# EAGLE board stepper-shield (EAGLE 4.13)
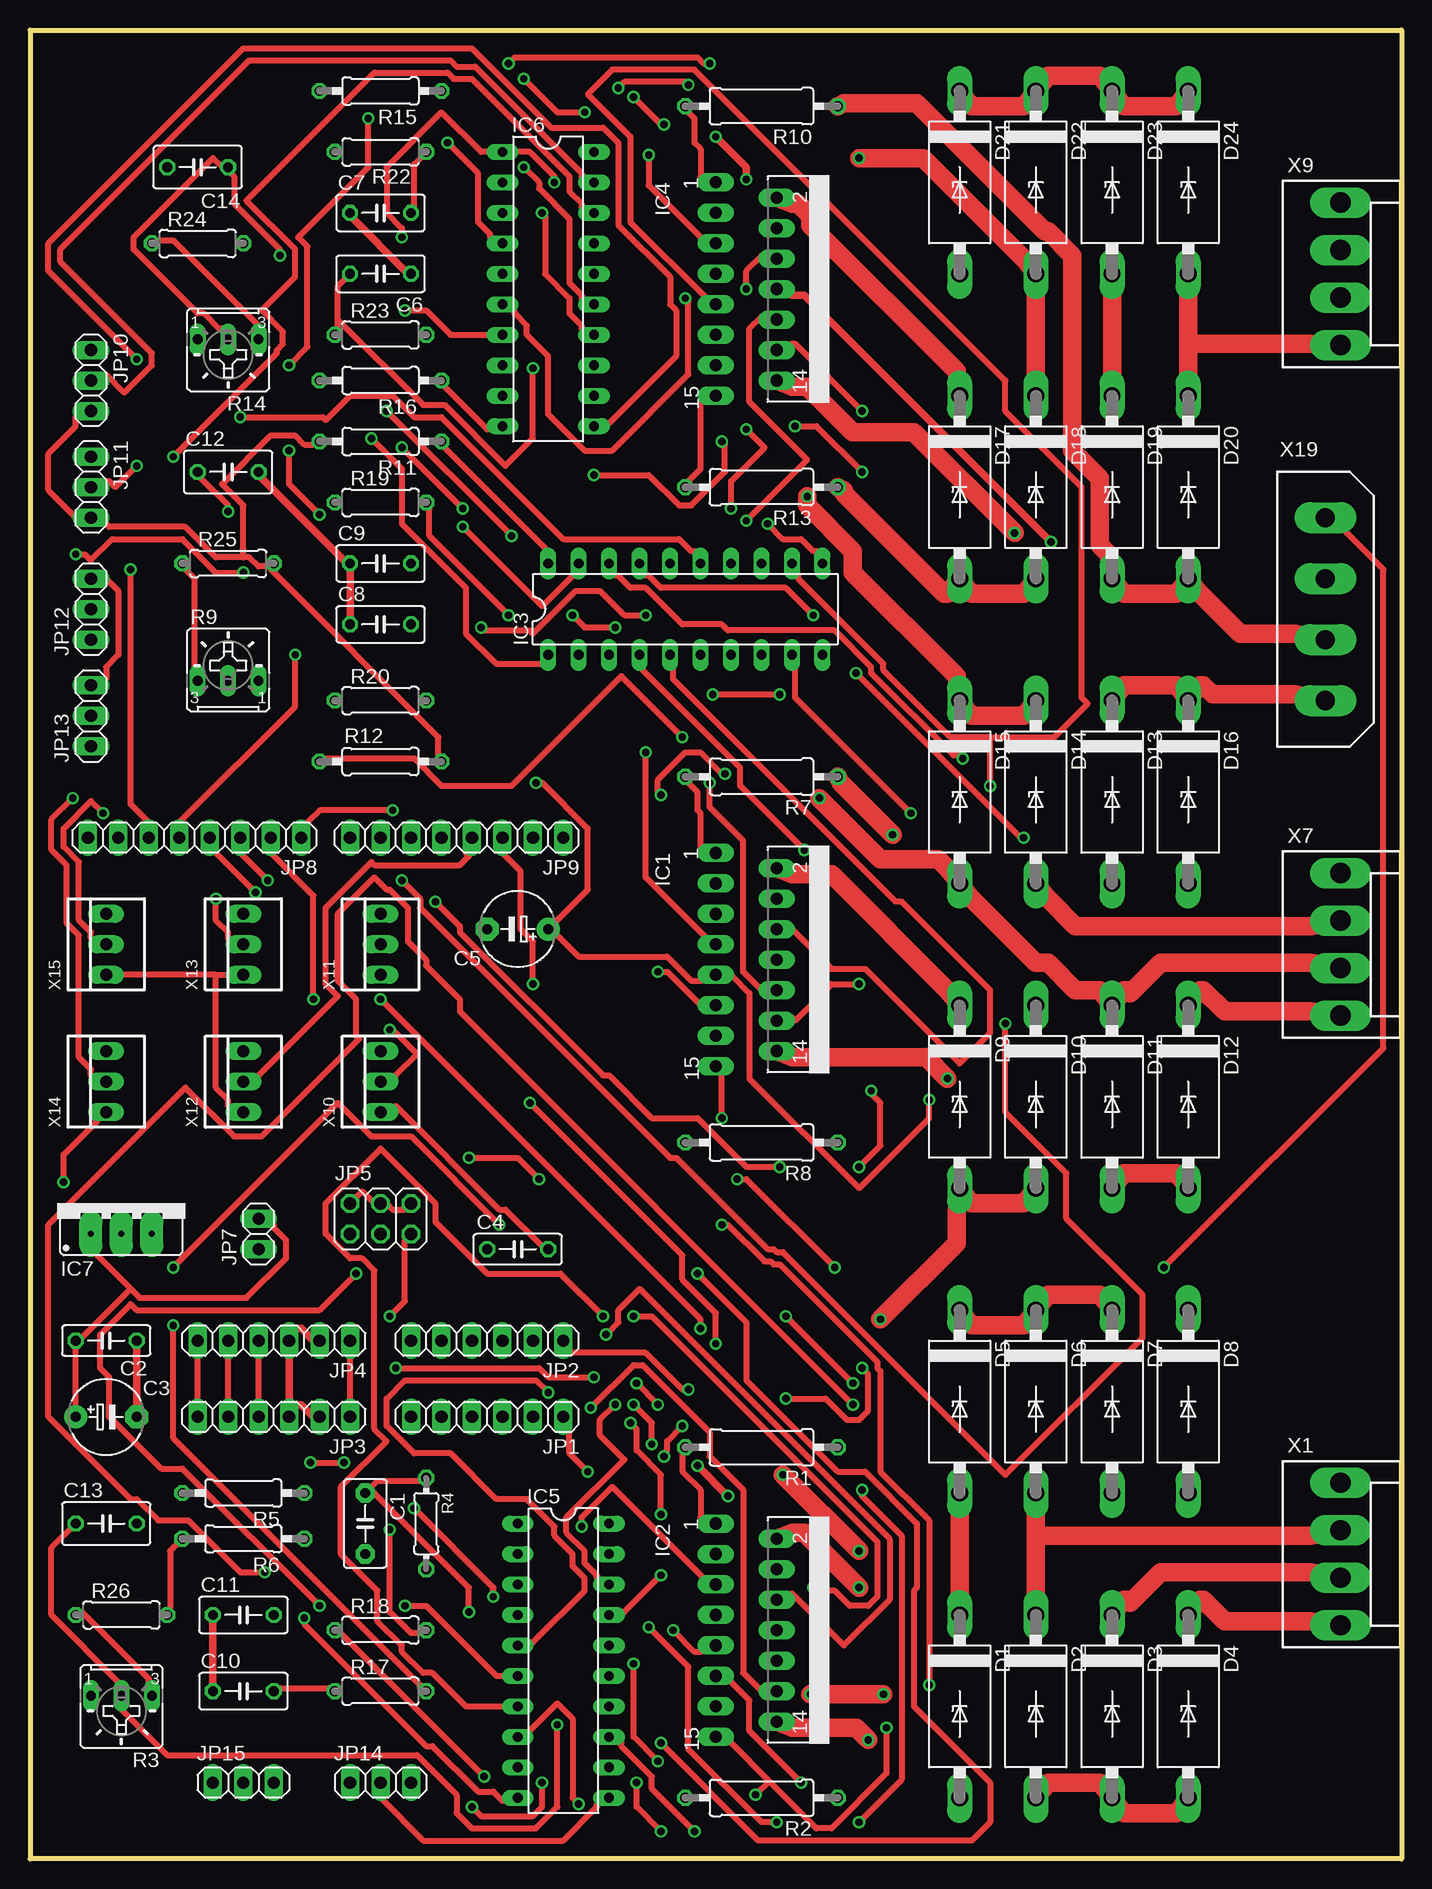
[diagram p0: board, top side]
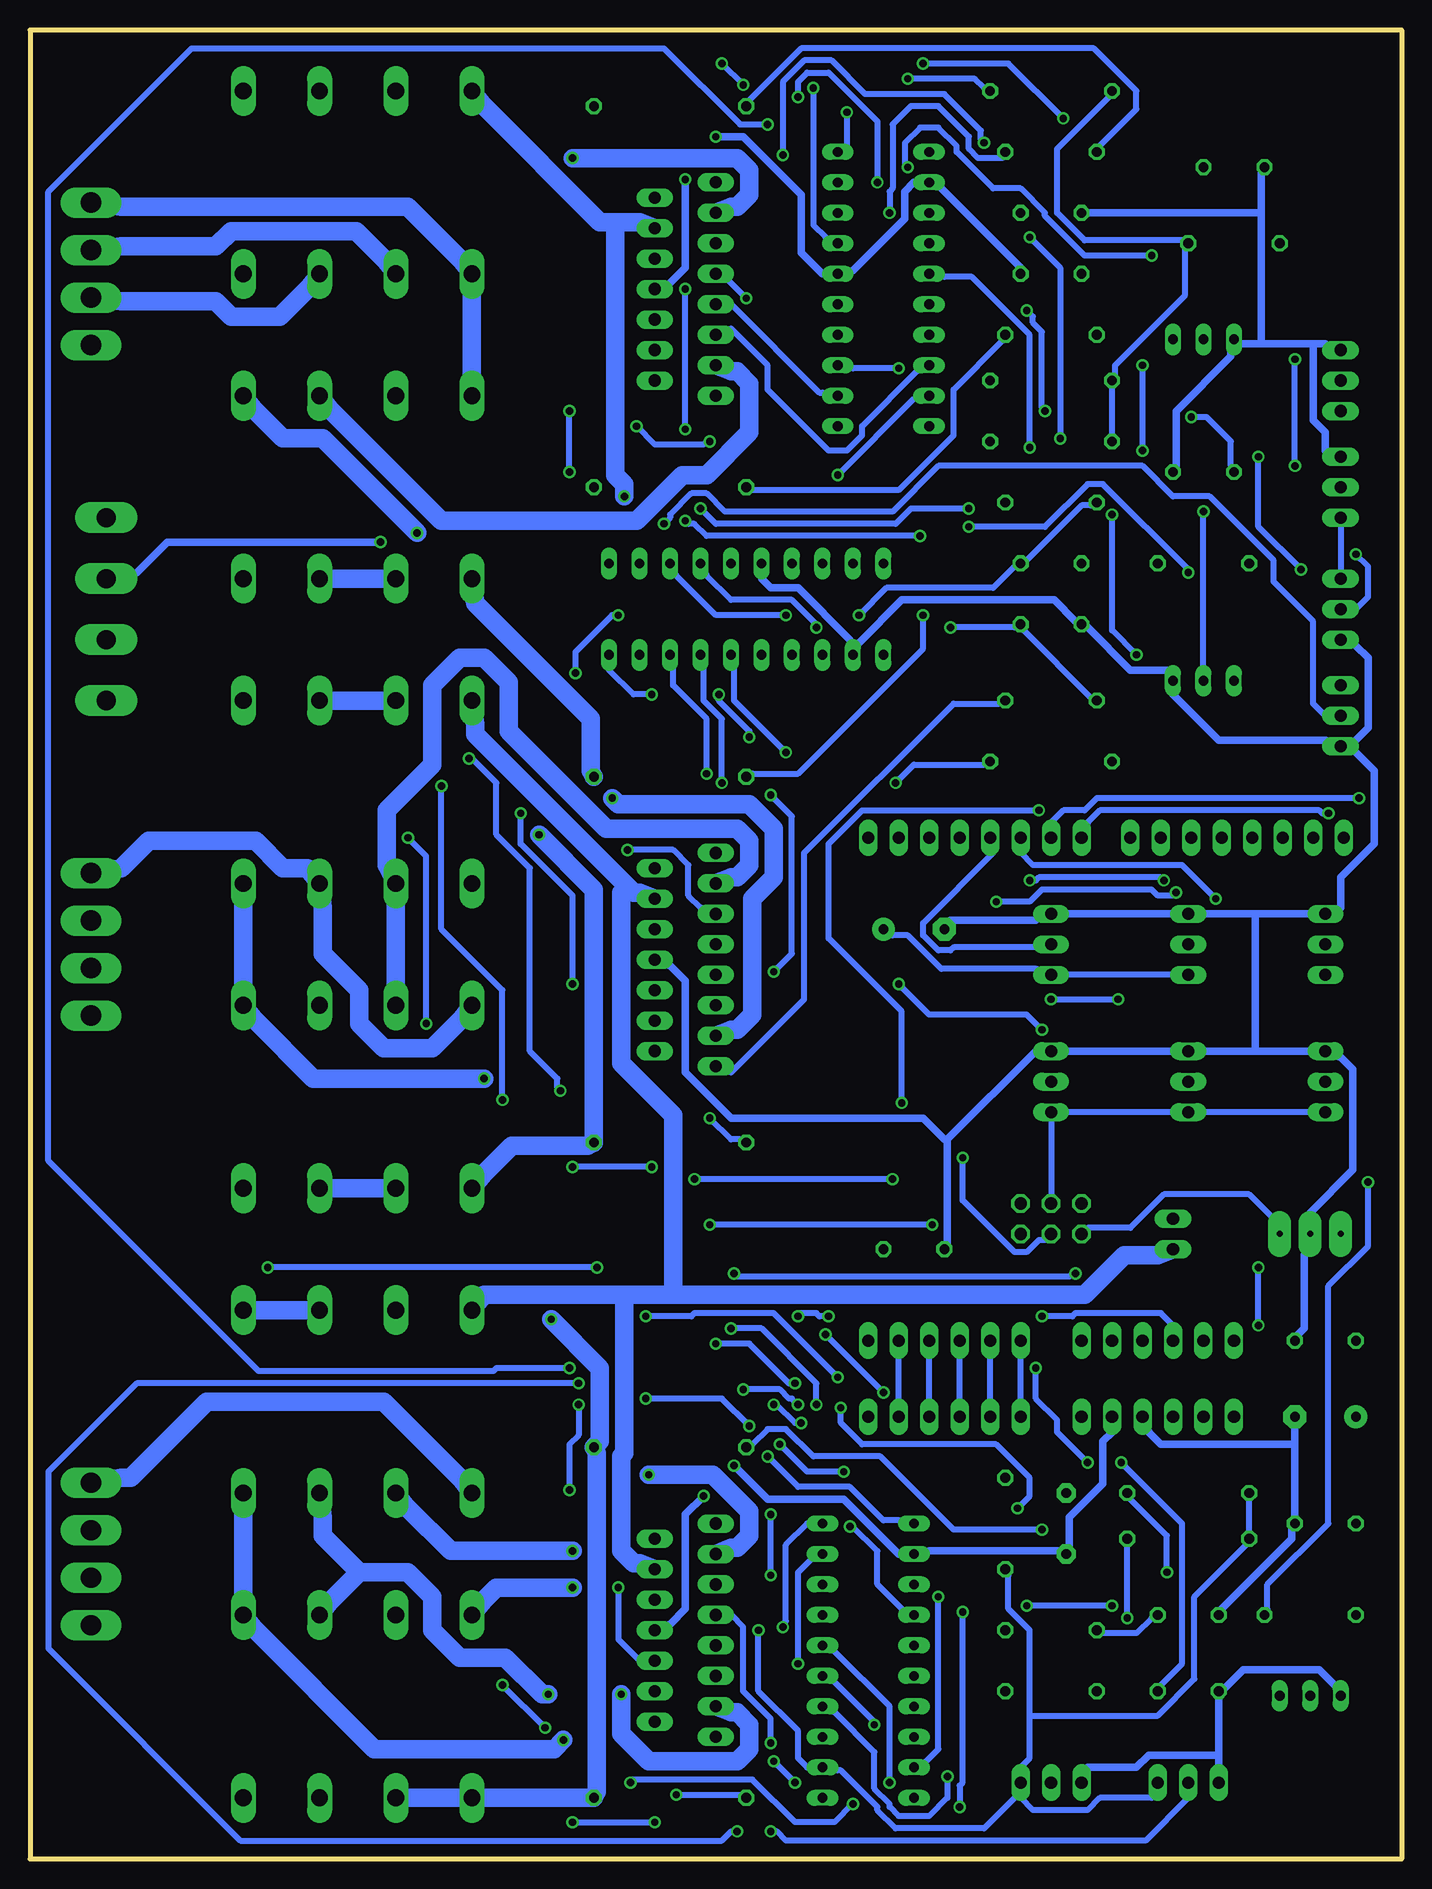
[diagram p1: board, bottom side, seen from below]

Size 114.3 x 152.4 mm. Coordinates in mm from the lower left corner, seen from the top.
Outline: 114.3,152.4 114.3,0 0,0 0,152.4 114.3,152.4
Copper layers (1*16): Top 0.035mm / dielectric 1.5mm / Bottom 0.035mm
Design rules "default": minimum track width 10mil, minimum drill 24mil, track to track 8mil, track to pad 8mil, pad to pad 8mil, via to via 8mil, smd to smd 8mil, copper to edge 40mil, drill to drill 8mil, minimum pad ring 10mil, minimum via ring 8mil, stop-mask expansion 4mil, vias tented up to drill 0mil, thermal gap 10mil
Net classes: 0 default: width 0.508 mm, drill 0.381 mm; 1 Power: width 1.524 mm, drill 0.508 mm; 2 Signal: width 0.635 mm, drill 0.381 mm; 3 Ground: width 0.635 mm, drill 0.381 mm

## Footprints (pad centres in the part's own frame; a part is rotated, then mirrored left to right if it is on the bottom)
C5B3.5 = drill 0.813 pad 1.6 octagon: 1 -2.54,0; 2 2.54,0
C050-025X075 = drill 0.813 octagon: 1 -2.54,0; 2 2.54,0
E5-6 = drill 0.813 pad 1.905 round: + -2.54,0 | drill 0.813 pad 1.905 octagon: - 2.54,0
C050-030X075 = drill 0.813 octagon: 1 -2.54,0; 2 2.54,0
C050-035X075 = drill 0.813 octagon: 1 -2.54,0; 2 2.54,0
CB429-15 = drill 1.397 long: A 7.62,0; C -7.62,0
MULTIWATT-15 = drill 1.016 long: 1 -8.89,-7.62; 2 -7.62,-2.54; 3 -6.35,-7.62; 4 -5.08,-2.54; 5 -3.81,-7.62; 6 -2.54,-2.54; 7 -1.27,-7.62; 8 0,-2.54; 9 1.27,-7.62; 10 2.54,-2.54; 11 3.81,-7.62; 12 5.08,-2.54; 13 6.35,-7.62; 14 7.62,-2.54; 15 8.89,-7.62
DIL20 = drill 0.813 long: 1 -11.43,-3.81; 2 -8.89,-3.81; 3 -6.35,-3.81; 4 -3.81,-3.81; 5 -1.27,-3.81; 6 1.27,-3.81; 7 3.81,-3.81; 8 6.35,-3.81; 9 8.89,-3.81; 10 11.43,-3.81; 11 11.43,3.81; 12 8.89,3.81; 13 6.35,3.81; 14 3.81,3.81; 15 1.27,3.81; 16 -1.27,3.81; 17 -3.81,3.81; 18 -6.35,3.81; 19 -8.89,3.81; 20 -11.43,3.81
78XXS = drill 0.5 pad 1.93 long: GND 0,-2.54; IN -2.54,-2.54; OUT 2.54,-2.54
1X06 = drill 1.016 long: 1 -6.35,0; 2 -3.81,0; 3 -1.27,0; 4 1.27,0; 5 3.81,0; 6 6.35,0
2X03 = drill 1.016 octagon: 1 -2.54,-1.27; 2 -2.54,1.27; 3 0,-1.27; 4 0,1.27; 5 2.54,-1.27; 6 2.54,1.27
1X02 = drill 1.016 long: 1 -1.27,0; 2 1.27,0
1X08 = drill 1.016 long: 1 -8.89,0; 2 -6.35,0; 3 -3.81,0; 4 -1.27,0; 5 1.27,0; 6 3.81,0; 7 6.35,0; 8 8.89,0
1X03 = drill 1.016 long: 1 -2.54,0; 2 0,0; 3 2.54,0
0309/12 = drill 0.813 octagon: 1 -6.35,0; 2 6.35,0
B25U = drill 0.813 long: A 2.54,-0.889; E -2.54,-0.889; S 0,-0.889
0204/7 = drill 0.813 octagon: 1 -3.81,0; 2 3.81,0
0207/10 = drill 0.813 octagon: 1 -5.08,0; 2 5.08,0
0207/7 = drill 0.813 octagon: 1 -3.81,0; 2 3.81,0
KK-156-4 = drill 1.7 pad 2.184 long: 1 -5.94,0; 2 -1.98,0; 3 1.98,0; 4 5.94,0
22-23-2031 = drill 1 long: 1 -2.54,0; 2 0,0; 3 2.54,0
9090-4V = drill 1.6 pad 2.6 long: 1 -7.62,0; 2 -2.54,0; 3 2.54,0; 4 7.62,0

## Placement (x,y rotation side)
C1  3.3 nF  [C5B3.5]  27.94,27.94 270 top
C2  100nf  [C050-025X075]  6.35,43.18 180 top
C3  100uF  [E5-6]  6.35,36.83 0 top
C4  100nf  [C050-025X075]  40.64,50.8 0 top
C5  100uF  [E5-6]  40.64,77.47 180 top
C6  1n  [C050-030X075]  29.21,132.08 180 top
C7  1n  [C050-030X075]  29.21,137.16 0 top
C8  1n  [C050-030X075]  29.21,102.87 0 top
C9  1n  [C050-030X075]  29.21,107.95 0 top
C10  1n  [C050-030X075]  17.78,13.97 0 top
C11  1n  [C050-030X075]  17.78,20.32 0 top
C12  100nf  [C050-035X075]  16.51,115.57 0 top
C13  100nf  [C050-035X075]  6.35,27.94 0 top
C14  100nf  [C050-035X075]  13.97,140.97 180 top
D1  UF5404  [CB429-15]  77.47,12.7 270 top
D2  UF5404  [CB429-15]  83.82,12.7 270 top
D3  UF5404  [CB429-15]  90.17,12.7 270 top
D4  UF5404  [CB429-15]  96.52,12.7 270 top
D5  UF5404  [CB429-15]  77.47,38.1 270 top
D6  UF5404  [CB429-15]  83.82,38.1 270 top
D7  UF5404  [CB429-15]  90.17,38.1 270 top
D8  UF5404  [CB429-15]  96.52,38.1 270 top
D9  UF5404  [CB429-15]  77.47,63.5 270 top
D10  UF5404  [CB429-15]  83.82,63.5 270 top
D11  UF5404  [CB429-15]  90.17,63.5 270 top
D12  UF5404  [CB429-15]  96.52,63.5 270 top
D13  UF5404  [CB429-15]  90.17,88.9 270 top
D14  UF5404  [CB429-15]  83.82,88.9 270 top
D15  UF5404  [CB429-15]  77.47,88.9 270 top
D16  UF5404  [CB429-15]  96.52,88.9 270 top
D17  UF5404  [CB429-15]  77.47,114.3 270 top
D18  UF5404  [CB429-15]  83.82,114.3 270 top
D19  UF5404  [CB429-15]  90.17,114.3 270 top
D20  UF5404  [CB429-15]  96.52,114.3 270 top
D21  UF5404  [CB429-15]  77.47,139.7 270 top
D22  UF5404  [CB429-15]  83.82,139.7 270 top
D23  UF5404  [CB429-15]  90.17,139.7 270 top
D24  UF5404  [CB429-15]  96.52,139.7 270 top
IC1  L298  [MULTIWATT-15]  64.77,74.93 270 top
IC2  L298  [MULTIWATT-15]  64.77,19.05 270 top
IC3  L297  [DIL20]  54.61,104.14 0 top
IC4  L298  [MULTIWATT-15]  64.77,130.81 270 top
IC5  L297  [DIL20]  44.45,16.51 270 top
IC6  L297  [DIL20]  43.18,130.81 270 top
IC7  7805  [78XXS]  7.62,54.61 0 top
JP1  Arduino Analog  [1X06]  38.1,36.83 180 top
JP2  Stepper Analog  [1X06]  38.1,43.18 180 top
JP3  Arduino Power  [1X06]  20.32,36.83 180 top
JP4  Stepper Power  [1X06]  20.32,43.18 180 top
JP5  Vcc Select  [2X03]  29.21,53.34 0 top
JP7  12v Enable  [1X02]  19.05,52.07 90 top
JP8  Arduino 8-13  [1X08]  13.72,85.09 180 top
JP9  Arduino 0-7  [1X08]  35.56,85.09 180 top
JP10  Z Half / Full  [1X03]  5.08,123.19 270 top
JP11  Z Control  [1X03]  5.08,114.3 270 top
JP12  Y Half/Full  [1X03]  5.08,104.14 90 top
JP13  Y Control  [1X03]  5.08,95.25 90 top
JP14  X Control  [1X03]  29.21,6.35 0 top
JP15  X Half/Full  [1X03]  17.78,6.35 0 top
R1  0.5  [0309/12]  60.96,34.29 180 top
R2  0.5  [0309/12]  60.96,5.08 180 top
R3  2K  [B25U]  7.62,12.7 180 top
R4  22K  [0204/7]  33.02,27.94 270 top
R5  10K  [0207/10]  17.78,30.48 180 top
R6  10K  [0207/10]  17.78,26.67 180 top
R7  0.5  [0309/12]  60.96,90.17 180 top
R8  0.5  [0309/12]  60.96,59.69 180 top
R9  2K  [B25U]  16.51,99.06 0 top
R10  0.5  [0309/12]  60.96,146.05 180 top
R11  10K  [0207/10]  29.21,118.11 180 top
R12  10K  [0207/10]  29.21,91.44 0 top
R13  0.5  [0309/12]  60.96,114.3 180 top
R14  2K  [B25U]  16.51,125.73 180 top
R15  10K  [0207/10]  29.21,147.32 180 top
R16  10K  [0207/10]  29.21,123.19 180 top
R17  4K7  [0207/7]  29.21,13.97 0 top
R18  4K7  [0207/7]  29.21,19.05 0 top
R19  4K7  [0207/7]  29.21,113.03 0 top
R20  4K7  [0207/7]  29.21,96.52 0 top
R22  4K7  [0207/7]  29.21,142.24 180 top
R23  4K7  [0207/7]  29.21,127 0 top
R24  2K7  [0207/7]  13.97,134.62 0 top
R25  2K7  [0207/7]  16.51,107.95 0 top
R26  2K7  [0207/7]  7.62,20.32 0 top
X1  [KK-156-4]  109.22,25.4 270 top
X7  [KK-156-4]  109.22,76.2 270 top
X9  [KK-156-4]  109.22,132.08 270 top
X10  X Min  [22-23-2031]  29.21,64.77 90 top
X11  X Max  [22-23-2031]  29.21,76.2 90 top
X12  Y Min  [22-23-2031]  17.78,64.77 90 top
X13  Y Max  [22-23-2031]  17.78,76.2 90 top
X14  Z Min  [22-23-2031]  6.35,64.77 90 top
X15  Z Max  [22-23-2031]  6.35,76.2 90 top
X19  9090-4V  [9090-4V]  107.95,104.14 270 top

## Library data of the parts
C1 = capacitor-wima
C2-C14 R1 R2 R4-R8 R10-R13 R15-R20 R22-R26 = rcl
D1-D24 = diode
IC1-IC6 = st-microelectronics
IC7 = cls
JP1-JP5 JP7-JP15 = pinhead
R3 R9 R14 = pot
X1 X7 X9-X15 = con-molex
X19 = con-thomas-betts

## Nets
GND [Ground]: C1.2 C2.1 C3.- C4.1 C5.- C6.1 C7.1 C8.1 C9.1 C10.1 C11.1 C12.2 C13.2 C14.2 IC1.8 IC2.8 IC3.2 IC3.16 IC4.8 IC5.2 IC6.2 IC6.16 IC7.GND JP3.2 JP3.3 JP4.2 JP4.3 JP10.1 JP11.1 JP12.1 JP13.1 JP14.1 JP15.1 R3.A R9.A R14.A X10.3 X11.3 X12.3 X13.3 X14.3 X15.3 X19.2
GND1 [Power]: D1.A D2.A D3.A D4.A D9.A D10.A D11.A D12.A D17.A D18.A D19.A D20.A R1.1 R2.1 R7.1 R8.1 R10.1 R13.1 X19.3
N$1: IC2.11 IC5.8
N$2: IC2.6 IC5.5
N$3: IC2.12 IC5.9
N$4: IC2.10 IC5.7
N$5: IC2.7 IC5.6
N$6: IC2.5 IC5.4
N$7: C1.1 IC5.16 R4.1
N$8: C11.2 IC5.14 R18.1
N$9: IC2.15 R2.2 R17.2
N$10: IC5.17 JP8.1
N$11: IC5.18 JP8.2
N$12: IC2.1 R1.2 R18.2
N$13 [Power]: D4.C D8.A IC2.14 X1.4
N$14: IC5.10 R6.1
N$15: IC5.20 R5.1
N$16: IC1.11 IC3.8
N$17: IC1.6 IC3.5
N$18: IC5.19 JP15.2
N$19: IC1.12 IC3.9
N$20 [Power]: D3.C D7.A IC2.13 X1.3
N$21: R3.E R26.1
N$22 [Power]: D2.C D6.A IC2.3 X1.2
N$23: IC1.10 IC3.7
N$24: IC1.7 IC3.6
N$25: IC1.5 IC3.4
N$26: C9.2 IC3.14 R19.1
N$27: C8.2 IC3.13 R20.1
N$28: IC3.19 JP12.2
N$29: C12.1 IC3.15 R9.S
N$30: IC3.17 JP8.3
N$31: IC3.18 JP8.4
N$32: IC3.1 IC5.1 IC6.1
N$33 [Power]: D9.C D13.A IC1.2 X7.1
N$34 [Power]: D10.C D14.A IC1.3 X7.2
N$35 [Power]: D11.C D15.A IC1.13 X7.3
N$36 [Power]: D12.C D16.A IC1.14 X7.4
N$37: IC3.10 R12.1
N$38: IC3.20 R11.1
N$39: IC4.12 IC6.9
N$40: IC4.10 IC6.7
N$41: IC4.7 IC6.6
N$42: IC4.5 IC6.4
N$43: IC4.11 IC6.8
N$44: IC4.6 IC6.5
N$45: C7.2 IC6.14 R22.1
N$46: C6.2 IC6.13 R23.1
N$47: IC6.19 JP10.2
N$48: C14.1 IC6.15 R14.S
N$49 [Power]: D17.C D21.A IC4.2 X9.1
N$50 [Power]: D18.C D22.A IC4.3 X9.2
N$51 [Power]: D19.C D23.A IC4.13 X9.3
N$52 [Power]: D20.C D24.A IC4.14 X9.4
N$53: IC6.20 R15.1
N$54: IC6.10 R16.1
N$55: IC6.17 JP8.5
N$56: IC6.18 JP8.6
N$57: JP5.3 X19.1
N$58: IC7.OUT JP5.1
N$59: JP9.1
N$60: JP9.4 X12.2
N$61: JP9.5 X11.2
N$62: JP9.6 X13.2
N$63: JP9.2
N$64: JP1.1 JP2.1
N$65: JP1.2 JP2.2
N$66: JP1.3 JP2.3
N$67: JP1.4 JP2.4
N$68: JP1.5 JP2.5
N$69: JP8.8
N$70: JP1.6 JP2.6
N$71: JP3.1 JP4.1
N$72: IC4.15 R13.2 R23.2
N$73: IC4.1 R10.2 R22.2
N$74: IC3.11 JP13.2
N$75 [Power]: D1.C D5.A IC2.2 X1.1
N$76: C10.2 IC5.13 R17.1
N$77: C13.1 IC5.15 R3.S
N$78: IC5.11 JP14.2
N$79: C2.2 C3.+ IC7.IN JP7.2
N$80: R9.E R25.1
N$81: R14.E R24.1
N$82: JP8.7
N$83: IC1.15 R8.2 R20.2
N$84: IC6.11 JP11.2
N$85: JP9.7 X14.2
N$86: JP9.8 X15.2
N$87: JP9.3 X10.2
N$88: JP3.4 JP4.4 JP5.5
N$89: JP3.5 JP4.5
N$92: IC3.3
N$95: IC5.3
N$96: IC6.3
N$97: IC1.1 R7.2 R19.2
N$98: JP3.6 JP4.6
VCC: C4.2 C5.+ IC1.9 IC2.9 IC3.12 IC4.9 IC5.12 IC6.12 JP5.2 JP5.4 JP5.6 JP10.3 JP11.3 JP12.3 JP13.3 JP14.3 JP15.3 R4.2 R5.2 R6.2 R11.2 R12.2 R15.2 R16.2 R24.2 R25.2 R26.2 X10.1 X11.1 X12.1 X13.1 X14.1 X15.1
VSS [Power]: D5.C D6.C D7.C D8.C D13.C D14.C D15.C D16.C D21.C D22.C D23.C D24.C IC1.4 IC2.4 IC4.4 JP7.1 X19.4

## Tracks (layer width: path | path; a pad name or v marks a point on that pad's centre or on a via)
GND  (via drill 0.61)
  Top 0.635: v55.63,32.77 v58.17,30.23 | C10.1 C11.1 | JP3.2 23.62,36.83 22.61,37.85 22.1,37.85 JP3.3 JP4.3 22.1,44.2 22.61,44.2 23.62,43.18 JP4.2 | C3.- C2.1 | v85.09,109.73 64.52,130.3 63.5,130.3 IC4.8 | C6.1 31.24,132.33 26.92,136.65 C7.1 | C8.1 C9.1 26.16,108.2 19.3,115.06 C12.2 | v59.69,139.95 59.69,140.97 v57.15,143.51
  Bottom 0.635: C5.- 37.59,78.23 30.48,78.23 X11.3 X13.3 12.19,78.74 | 12.19,78.74 X15.3 5.08,79.25 5.08,81.79 2.29,84.58 2.29,90.68 3.81,92.2 JP13.1 | 12.19,67.31 X14.3 5.08,66.8 4.06,65.79 4.06,57.4 7.62,53.85 IC7.GND 8.13,50.29 8.13,44.2 8.64,43.69 C2.1 | 12.19,67.31 X12.3 X10.3 30.48,67.31 37.85,59.94 | 37.85,59.94 37.85,51.31 C4.1 | IC1.8 60.96,74.42 59.69,73.15 59.69,65.53 55.88,61.72 39.88,61.72 38.1,59.94 37.85,59.94 | 12.19,67.31 12.19,78.74 | v58.17,30.23 59.69,28.7 59.69,20.83 60.96,19.56 IC2.8 | v55.63,32.77 52.83,29.97 46.48,29.97 41.91,25.4 IC5.2 39.37,25.65 28.7,25.65 C1.2 27.69,26.16 27.69,28.45 24.89,31.24 24.89,34.8 24.13,35.56 JP3.2 | R3.A 5.59,14.48 6.86,15.75 13.21,15.75 14.73,14.22 C10.1 15.24,8.64 | 15.24,8.64 JP15.1 | JP14.1 26.16,7.62 22.1,7.62 21.08,8.64 15.24,8.64 | 8.89,34.54 C13.2 9.14,27.43 9.14,26.67 14.99,20.83 C11.1 | 8.89,34.54 C3.- | JP3.3 21.08,35.56 20.07,34.54 8.89,34.54 | v85.09,109.73 102.87,109.73 105.41,107.19 X19.2 | C6.1 31.75,132.59 38.35,139.19 IC6.2 40.64,139.7 41.4,138.94 41.4,136.65 45.72,132.33 IC6.16 48.26,132.08 50.04,133.86 50.04,138.68 54.86,143.51 v57.15,143.51 | 7.37,126.24 6.35,126.24 JP10.1 | 11.68,126.24 7.37,126.24 | 11.68,126.24 13.46,126.24 R14.A 14.22,125.48 14.22,125.22 18.8,120.65 18.8,116.08 C12.2 | 11.68,137.16 11.68,140.46 C14.2 | 11.68,126.24 11.68,137.16 | JP11.1 6.35,117.35 6.35,118.87 7.37,119.89 7.37,126.24 | 11.68,137.16 C7.1 | IC3.16 53.34,106.68 52.58,105.92 50.29,105.92 45.97,101.6 IC3.2 45.21,101.35 41.66,104.9 28.96,104.9 27.18,103.12 C8.1 26.16,102.62 22.61,99.06 19.56,99.06 R9.A 19.05,97.03 15.24,93.22 6.35,93.22 JP13.1
  Bottom 0.635: JP13.1 3.81,93.22 2.79,94.23 2.79,100.08 3.81,101.09 JP12.1 | v59.69,139.95 59.69,132.59 60.96,131.32 IC4.8
GND1  (via drill 0.61)
  Top 1.524: D11.A 91.19,57.15 95.5,57.15 D12.A | D10.A 82.8,54.61 78.49,54.61 D9.A 77.22,53.85 77.22,51.31 v70.87,44.96 | D2.A 84.84,6.35 89.15,6.35 D3.A 91.19,3.81 95.5,3.81 D4.A | R13.1 67.82,114.05 67.82,113.79 76.2,105.41 76.45,105.41 D17.A 78.49,105.41 82.8,105.41 D18.A | R10.1 67.82,146.3 73.91,146.3 84.58,135.64 84.84,135.64 86.87,133.6 86.87,117.35 89.15,115.06 89.15,109.47 89.92,108.71 D19.A 91.19,105.41 95.5,105.41 D20.A 97.54,105.41 100.84,102.11 105.41,102.11 X19.3 | v71.88,85.34 67.56,89.66 R7.1
  Bottom 1.524: D9.A 76.45,57.15 74.17,59.44 67.82,59.44 R8.1 67.31,80.77 v71.88,85.34 | D10.A D11.A | D2.A D1.A R2.1 67.06,5.59 67.06,33.78 R1.1 66.8,34.8 66.8,40.89 v70.87,44.96 | R7.1 67.56,90.68 67.56,95 77.22,104.65 D17.A | D18.A D19.A
N$1  (via drill 0.61)
  Top 0.508: v45.72,4.57 45.21,5.08 45.21,11.68 43.94,12.95 41.66,10.67 IC5.8 | v64.26,6.35 59.94,10.67 59.94,13.21 58.42,14.73 IC2.11
  Bottom 0.508: v45.72,4.57 47.24,3.05 50.55,3.05 54.1,6.6 64.01,6.6 v64.26,6.35
N$2  (via drill 0.61)
  Top 0.508: v43.18,38.86 42.16,39.88 31.24,39.88 29.72,38.35 29.72,36.07 32,33.78 35.05,33.78 38.86,29.97 41.4,29.97 43.69,27.69 43.69,26.92 45.21,25.4 45.21,24.38 46.23,23.37 46.23,22.35 41.91,18.03 IC5.5 | v48.01,43.69 49.02,44.7 49.02,45.72 50.8,47.5 71.63,26.67 71.63,21.59 67.82,17.78 63.5,22.1 IC2.6
  Bottom 0.508: v43.18,38.86 v48.01,43.69
N$3  (via drill 0.61)
  Top 0.508: v38.61,21.84 38.61,22.61 v32,29.21 | v46.74,37.59 50.29,41.15 51.05,41.15 56.64,35.56 56.64,33.53 59.44,30.73 59.44,15.49 60.96,13.97 IC2.12
  Bottom 0.508: v38.61,21.84 38.61,9.14 39.62,8.13 IC5.9 | v32,29.21 30.99,30.23 30.99,31.75 33.78,34.54 44.96,34.54 46.74,36.32 v46.74,37.59
N$4  (via drill 0.61)
  Top 0.508: v47.75,45.21 44.2,48.77 38.1,48.77 33.78,53.09 33.78,54.61 29.21,59.18 24.64,54.61 24.64,52.07 26.67,50.04 27.69,50.04 28.7,49.02 28.7,35.81 29.72,34.8 25.91,30.99 25.91,25.4 28.96,22.35 28.96,19.81 30.99,17.78 30.99,17.27 32.77,15.49 33.53,15.49 36.32,12.7 IC5.7 | v50.29,45.21 51.82,45.21 70.61,26.42 70.61,21.84 69.85,21.08 68.33,21.08 67.06,22.35 65.53,22.35 v65.28,22.61
  Bottom 0.508: v47.75,45.21 48.51,45.21 48.77,45.47 50.04,45.47 v50.29,45.21 | v65.28,22.61 65.28,18.29 63.5,16.51 IC2.10
N$5  (via drill 0.61)
  Top 0.508: v31.24,21.08 33.02,21.08 38.86,15.24 IC5.6 | v24.13,21.08 12.7,32.51 10.92,32.51 6.6,36.83 6.6,40.13 5.84,40.89 5.84,43.69 8.38,46.23 8.89,45.72 24.13,45.72 v27.18,48.77 | v55.63,48.77 59.69,44.7 59.69,39.88 67.31,32.26 69.6,32.26 73.91,27.94 73.91,22.61 73.66,22.35 73.66,12.7 80.01,6.35 80.01,3.05 78.49,1.52 60.71,1.52 v52.58,9.65
  Bottom 0.508: v24.13,21.08 v31.24,21.08 | v27.18,48.77 27.43,48.77 27.69,48.51 55.37,48.51 v55.63,48.77 | v52.58,9.65 52.58,11.68 54.86,13.97 54.86,19.3 55.88,20.32 IC2.7
N$6  (via drill 0.61)
  Top 0.508: v45.97,27.69 45.97,28.45 48.51,30.99 56.13,23.37 IC2.5
  Bottom 0.508: v45.97,27.69 45.72,27.69 43.69,25.65 43.69,22.86 41.66,20.83 IC5.4
N$7  (via drill 0.61)
  Top 0.508: R4.1 32.51,31.5 28.96,31.5 C1.1 28.7,30.48 36.58,22.61 v36.58,20.57 | v42.67,6.35 42.67,4.32 41.91,3.56 37.59,3.56 v36.83,4.32
  Bottom 0.508: v42.67,6.35 42.67,12.7 47.24,17.27 IC5.16 | v36.83,4.32 36.83,6.1 36.58,6.35 v36.58,20.57
N$8  (via drill 0.61)
  Top 0.508: v37.85,6.86 25.91,18.8 R18.1
  Bottom 0.508: R18.1 24.89,18.8 22.1,18.8 20.83,20.07 C11.2 | v37.85,6.86 37.85,5.08 39.37,3.56 41.91,3.56 42.67,4.32 42.67,4.57 43.94,5.84 43.94,8.89 47.24,12.19 IC5.14
N$9  (via drill 0.61)
  Top 0.508: v11.94,44.45 11.94,35.05 32.51,14.48 32.51,14.22 R17.2 | v11.94,49.28 25.65,62.99 28.45,60.2 31.75,60.2 v39.12,52.83 | v57.66,52.83 58.17,52.83 61.21,49.78 61.72,49.78 61.98,49.53 62.48,49.53 70.61,41.4 70.61,40.89 70.87,40.64 70.87,32.26 74.93,28.19 v74.93,14.48 | v71.37,10.92 71.37,7.11 66.8,2.54 65.53,2.54 61.59,6.48 | 61.59,6.48 58.42,9.65 IC2.15 | 61.59,6.48 v60.45,5.33
  Bottom 0.508: v11.94,44.45 v11.94,49.28 | v39.12,52.83 v57.66,52.83 | v74.93,14.48 v71.37,10.92 | v60.45,5.33 55.12,5.33 R2.2
N$10  (via drill 0.61)
  Top 0.508: v52.58,23.62 49.53,20.57 IC5.17 | v52.58,28.7 52.58,32 50.55,34.04 50.55,35.81 v50.04,36.32 | v52.32,37.85 v50.55,39.62 | v57.15,42.93 57.15,45.47 54.36,48.26 54.36,50.29 v41.66,62.99 | v30.23,87.38 24.13,87.38 23.11,86.36 JP8.1
  Bottom 0.508: v52.58,23.62 v52.58,28.7 | v50.04,36.32 50.55,36.32 52.07,37.85 v52.32,37.85 | v50.55,39.62 51.05,39.62 54.36,42.93 v57.15,42.93 | v41.66,62.99 41.66,70.61 47.75,76.71 47.75,84.58 44.96,87.38 v30.23,87.38
N$11  (via drill 0.61)
  Top 0.508: v48.77,37.85 47.5,36.58 47.5,35.31 49.53,33.27 44.7,28.45 44.7,27.18 46.23,25.65 46.23,24.64 47.24,23.62 47.24,23.37 IC5.18 | v55.88,44.2 55.88,44.96 v29.21,71.63 | v23.62,71.63 23.62,80.26 20.07,83.82 JP8.2
  Bottom 0.508: v48.77,37.85 48.77,39.62 53.34,44.2 v55.88,44.2 | v29.21,71.63 v23.62,71.63
N$12  (via drill 0.61)
  Top 0.508: v29.97,27.43 29.97,20.57 31.75,18.8 32.51,18.8 R18.2 | IC2.1 55.88,28.45 55.88,30.73 54.36,32.26 54.36,33.78 R1.2
  Bottom 0.508: v29.97,27.43 37.34,27.43 43.43,33.53 49.02,33.53 51.31,35.81 52.83,35.81 54.1,34.54 R1.2
N$13  (via drill 0.61)
  Top 1.524: v69.85,9.91 68.83,10.92 63.5,10.92 IC2.14 | X1.4 106.68,19.81 99.57,19.81 97.79,21.59 97.54,21.59 D4.C
  Bottom 1.524: v69.85,9.91 70.61,9.14 85.6,9.14 95.5,19.05 D4.C D8.A
N$14  (via drill 0.61)
  Top 0.508: v22.86,20.07 22.86,19.56 33.02,9.4 33.53,9.4 37.34,5.59 38.61,5.59 39.37,4.83 IC5.10
  Bottom 0.508: v22.86,20.07 R6.1
N$15  (via drill 0.61)
  Top 0.508: v19.56,23.88 17.53,23.88 13.21,28.19 10.67,28.19 8.89,29.97 8.38,29.97 1.52,36.83 1.52,52.83 12.95,64.26 17.02,60.2 19.3,60.2 27.43,68.33 27.18,68.58 27.18,71.63 25.65,73.15 25.65,78.74 28.7,81.79 29.72,80.77 29.97,80.77 31.5,79.25 31.5,76.45 33.02,74.93 33.02,74.42 35.81,71.63 35.81,70.61 v68.58,37.85 | v69.34,30.73 69.34,30.23 72.64,26.92 72.64,6.6 v69.09,3.05 | v62.23,3.05 60.96,3.05 54.86,9.14 54.86,16 v51.56,19.3
  Bottom 0.508: v19.56,23.88 19.56,26.92 22.61,29.97 R5.1 | v68.58,37.85 68.58,35.31 69.34,34.54 v69.34,30.73 | v69.09,3.05 v62.23,3.05 | v51.56,19.3 51.56,19.56 51.31,19.81 51.31,26.16 49.53,27.94 IC5.20
N$16  (via drill 0.61)
  Top 0.508: v57.91,90.42 57.66,90.42 55.88,92.2 54.61,92.2 52.32,89.92 52.32,88.9 v52.58,88.65 | v52.32,73.91 53.09,73.91 55.88,71.12 IC1.11
  Bottom 0.508: v57.91,90.42 57.91,95 60.71,97.79 60.71,99.06 IC3.8 | v52.58,88.65 50.8,86.87 50.8,75.44 v52.32,73.91
N$17
  Top 0.508: IC3.5 53.59,99.06 53.59,98.3 72.14,79.76 72.64,79.76 80.01,72.39 80.01,68.83 77.47,66.29 69.6,74.17 66.8,74.17 63.5,77.47 IC1.6
N$18  (via drill 0.61)
  Top 0.508: v50.29,16.26 50.29,10.16 v52.32,8.13 | v50.55,6.35 50.55,4.32 v52.58,2.29
  Bottom 0.508: v50.29,16.26 50.29,23.88 49.28,24.89 IC5.19 | v50.55,6.35 v52.32,8.13 | v52.58,2.29 52.07,2.29 51.31,1.52 21.34,1.52 17.78,5.08 JP15.2
N$19  (via drill 0.61)
  Top 0.508: v73.41,87.12 63.75,96.77 63.75,99.06 IC3.9 | v69.09,72.9 66.8,72.9 63.75,69.85 63.5,70.1 IC1.12
  Bottom 0.508: v73.41,87.12 73.41,84.58 69.09,80.26 v69.09,72.9
N$20  (via drill 0.61)
  Top 1.524: v65.02,13.72 v71.12,13.72 | X1.3 106.68,23.88 94.23,23.88 91.69,21.34 91.44,21.59 91.19,21.59 D3.C
  Bottom 1.524: v65.02,13.72 65.02,10.41 62.74,8.13 55.37,8.13 54.36,9.14 54.36,11.18 55.37,12.19 55.88,12.19 IC2.13 | v71.12,13.72 71.63,13.72 74.68,16.76 78.49,16.76 80.77,19.05 80.77,21.84 82.8,23.88 86.87,23.88 | 86.87,23.88 89.15,21.59 D3.C | D7.A 89.92,28.45 89.92,26.92 86.87,23.88
N$21
  Top 0.508: R3.E 9.91,14.73 9.91,14.99 4.32,20.57 R26.1
N$22  (via drill 0.61)
  Top 1.524: v62.74,32 v69.09,25.65 | 83.82,26.92 D2.C | D6.A 83.82,26.92 | X1.2 106.68,26.92 83.82,26.92
  Bottom 1.524: v62.74,32 57.4,32 54.36,28.96 54.36,26.92 55.37,25.91 55.88,25.91 IC2.3 | v69.09,25.65 79.25,25.65 82.8,29.21 D6.A
N$23  (via drill 0.61)
  Top 0.508: v56.64,89.66 56.64,87.63 59.44,84.84 59.44,73.91 60.96,72.39 IC1.10
  Bottom 0.508: v56.64,89.66 56.64,95 58.17,96.52 58.17,99.06 IC3.7
N$24  (via drill 0.61)
  Top 0.508: v51.31,92.2 51.31,81.79 56.39,76.71 IC1.7
  Bottom 0.508: v51.31,92.2 55.63,96.52 55.63,99.06 IC3.6
N$25  (via drill 0.61)
  Top 0.508: v64.52,84.07 59.18,89.41 59.18,90.93 51.05,99.06 IC3.4
  Bottom 0.508: v64.52,84.07 60.71,84.07 59.44,82.8 59.44,80.26 58.42,79.25 IC1.5
N$26  (via drill 0.61)
  Top 0.508: v48.77,102.62 46.23,102.62 v45.21,103.63
  Bottom 0.508: R19.1 25.91,112.78 26.67,112.78 31.24,108.2 C9.2 32.26,107.7 34.04,105.92 42.93,105.92 v45.21,103.63 | v48.77,102.62 48.77,102.87 50.8,104.9 55.88,104.9 57.91,106.93 IC3.14
N$27  (via drill 0.61)
  Top 0.508: v51.31,103.63 49.53,103.63 47.5,105.66 45.47,105.66 41.91,102.11 41.66,102.36 37.85,102.36 v37.59,102.62
  Bottom 0.508: R20.1 25.91,96.77 31.5,102.36 C8.2 32.26,102.62 v37.59,102.62 | v51.31,103.63 57.15,103.63 60.45,106.93 IC3.13
N$28  (via drill 0.61)
  Top 0.508: v36.07,111 42.67,104.39 45.21,106.93 IC3.19 | v17.78,107.19 15.49,107.19 12.7,109.98 6.86,109.98 5.08,108.2 4.57,108.71 v3.81,108.71
  Bottom 0.508: v36.07,111 29.72,111 26.16,114.55 24.89,114.55 17.78,107.44 v17.78,107.19 | v3.81,108.71 2.79,107.7 2.79,105.16 3.81,104.14 JP12.2
N$29  (via drill 0.61)
  Top 0.508: v16.51,112.27 16.51,112.78 14.22,115.06 C12.1 | v17.53,120.14 24.38,120.14 24.64,119.89 26.67,121.92 30.23,121.92 32,120.14 34.29,120.14 44.45,109.98 54.1,109.98 55.12,108.97 55.37,108.97 IC3.15
  Bottom 0.508: R9.S v16.51,112.27 | v17.53,120.14 16.26,120.14 14.22,118.11 14.22,116.08 C12.1
N$30  (via drill 0.61)
  Top 0.508: v65.28,103.63 62.99,105.92 52.58,105.92 51.56,106.93 51.31,106.93 IC3.17 | v68.83,98.81 82.55,85.09 v82.8,85.09 | v81.28,69.6 81.28,62.23 86.36,57.15 86.36,53.34 92.71,46.99 92.71,43.43 81.28,32 62.74,50.55 62.23,50.55 61.98,50.8 61.47,50.8 53.85,58.42 53.34,58.42 32.51,79.25 32.51,80.01 v30.99,81.53 | v19.81,81.53 17.53,83.82 JP8.3
  Bottom 0.508: v65.28,103.63 65.79,103.63 68.83,100.58 v68.83,98.81 | v82.8,85.09 81.28,83.57 v81.28,69.6 | v30.99,81.53 30.48,81.53 30.23,81.79 20.07,81.79 v19.81,81.53
N$31  (via drill 0.61)
  Top 0.508: v77.72,91.69 77.47,91.95 76.96,91.95 70.1,98.81 70.1,99.31 67.06,102.36 58.17,102.36 57.66,102.87 54.36,102.87 51.31,105.92 50.04,105.92 49.02,106.93 48.77,106.93 IC3.18 | v70.1,64.01 70.1,63.75 70.87,62.99 70.87,59.44 v69.09,57.66 | v62.48,57.66 59.69,57.66 55.63,61.72 51.82,61.72 48.26,65.28 47.75,65.28 35.81,77.22 35.81,77.72 v33.78,79.76 | v18.8,80.52 15.49,83.82 JP8.4
  Bottom 0.508: v77.72,91.69 77.47,91.69 75.44,89.66 75.44,85.34 72.64,82.55 72.64,67.31 70.36,65.02 70.36,64.26 v70.1,64.01 | v62.48,57.66 v69.09,57.66 | v33.78,79.76 30.99,79.76 29.97,80.77 20.83,80.77 20.32,80.26 19.05,80.26 v18.8,80.52
N$32  (via drill 0.61)
  Top 0.508: v52.83,33.53 52.83,33.78 53.09,34.04 53.09,34.8 v54.36,36.07 | v62.99,38.35 66.29,38.35 68.07,36.58 69.09,36.58 69.85,37.34 69.85,40.39 v69.34,40.89 | v52.83,144.53 52.58,144.53 v50.29,146.81 | v43.69,139.7 43.69,140.21 41.66,142.24 IC6.1 37.59,142.24 34.29,145.54 29.72,140.97 29.72,137.16 30.99,135.89 v30.99,135.13 | v28.45,118.36 30.99,115.82 30.99,111.25 36.32,105.92 36.32,102.11 38.86,99.57 42.67,99.57 IC3.1
  Bottom 0.508: v52.83,33.53 50.29,30.99 45.97,30.99 43.18,28.19 41.91,28.19 IC5.1 | v54.36,36.07 56.64,38.35 v62.99,38.35 | v69.34,40.89 75.44,40.89 75.69,40.64 95.25,40.64 112.78,58.17 112.78,138.94 100.84,150.88 61.47,150.88 55.12,144.53 v52.83,144.53 | v50.29,146.81 50.29,148.08 49.53,148.84 47.75,148.84 43.69,144.78 v43.69,139.7 | v28.45,118.36 28.45,132.59 v30.99,135.13
N$33
  Top 1.524: IC1.2 63.5,82.04 66.8,82.04 76.45,72.39 D9.C
  Bottom 1.524: X7.1 106.68,82.55 104.39,84.84 95.5,84.84 93.22,82.55 91.19,82.55 D13.A 89.92,79.25 89.92,75.44 86.87,72.39 86.87,69.6 84.84,67.56 80.77,67.56 78.49,69.85 D9.C
N$34
  Top 1.524: X7.2 106.68,77.72 87.12,77.72 84.84,80.01 D14.A
  Bottom 1.524: IC1.3 55.88,81.79 55.37,81.79 54.36,82.8 54.36,84.84 55.37,85.85 66.29,85.85 74.42,93.98 74.42,98.04 76.45,100.08 78.49,100.08 80.77,97.79 80.77,91.19 84.58,87.38 84.58,82.8 D14.A D10.C
N$35  (via drill 0.61)
  Top 1.524: v65.79,88.39 70.87,83.31 75.69,83.31 76.45,82.55 D15.A 78.49,80.01 83.82,74.68 84.84,74.68 87.12,72.39 89.15,72.39 D11.C 91.19,72.39 91.44,72.39 91.69,72.14 94.23,74.68 106.68,74.68 X7.3
  Bottom 1.524: v65.79,88.39 65.28,87.88 54.36,87.88 52.32,85.85 52.32,81.79 54.1,80.01 54.1,70.36 55.37,69.09 55.88,69.09 IC1.13
N$36  (via drill 0.61)
  Top 1.524: v76.45,65.02 74.68,66.8 63.5,66.8 IC1.14 | X7.4 106.68,70.61 99.57,70.61 97.79,72.39 97.54,72.39 D12.C
  Bottom 1.524: v76.45,65.02 90.68,65.02 95.5,69.85 D12.C D16.A
N$37  (via drill 0.61)
  Top 0.508: v54.36,93.47 49.28,98.55 40.13,89.41 34.29,89.41 32,91.69 24.64,91.69 R12.1 | v56.9,97.03 v62.48,97.03
  Bottom 0.508: v54.36,93.47 54.36,93.98 56.9,96.52 v56.9,97.03 | v62.48,97.03 64.01,97.03 66.04,99.06 IC3.10
N$38
  Top 0.508: IC3.20 42.93,109.22 34.54,117.6 R11.1
N$39  (via drill 0.61)
  Top 0.508: v46.99,115.32 51.56,115.32 54.1,112.78 55.12,112.78 57.91,115.57 57.91,117.86 v57.66,118.11 | v63.75,119.38 65.53,119.38 v69.34,115.57 | v69.34,120.65 63.75,126.24 63.5,126.24 IC4.12
  Bottom 0.508: v46.99,115.32 40.64,121.67 IC6.9 | v57.66,118.11 57.91,118.11 58.17,117.86 62.23,117.86 v63.75,119.38 | v69.34,115.57 v69.34,120.65
N$40  (via drill 0.61)
  Top 0.508: v31.24,129.03 33.02,129.03 35.05,127 IC6.7 | v40.13,110.24 v29.72,120.65 | v59.69,111.51 64.77,116.59 59.94,121.41 59.94,127.51 60.96,128.52 IC4.10
  Bottom 0.508: v31.24,129.03 30.73,128.52 30.73,128.02 29.97,127.25 29.97,120.9 v29.72,120.65 | v40.13,110.24 57.91,110.24 58.93,111.25 59.44,111.25 v59.69,111.51
N$41  (via drill 0.61)
  Top 0.508: v54.61,130.05 54.86,129.79 54.86,123.7 48.51,117.35 46.23,117.35 43.18,120.4 43.18,125.22 41.4,127 41.4,127.76 40.39,128.78 40.39,129.03 IC6.6
  Bottom 0.508: v54.61,130.05 56.13,131.57 IC4.7
N$42  (via drill 0.61)
  Top 0.508: v34.8,143 37.34,140.46 37.34,136.4 38.35,135.38 38.35,135.13 IC6.4 | v51.56,141.99 51.56,139.45 55.88,135.13 IC4.5
  Bottom 0.508: v34.8,143 35.05,143.26 35.05,144.02 38.1,147.07 44.7,147.07 47.5,149.86 49.78,149.86 51.56,148.08 v51.56,141.99
N$43
  Bottom 0.508: IC6.8 40.39,123.95 44.96,119.38 44.96,118.62 46.23,117.35 47.75,117.35 52.83,122.43 52.83,124.46 55.88,127.51 IC4.11
N$44  (via drill 0.61)
  Top 0.508: v36.07,112.52 v30.99,117.6 | v58.42,112.52 58.42,114.81 61.21,117.6 v59.69,119.13 | v59.69,130.81 59.69,132.33 60.96,133.6 IC4.6
  Bottom 0.508: v30.99,117.6 30.99,127 35.81,131.83 38.1,131.83 IC6.5 | v36.07,112.52 40.89,112.52 42.16,111.25 57.15,111.25 v58.42,112.52 | v59.69,119.13 v59.69,130.81
N$45  (via drill 0.61)
  Top 0.508: C7.2 32,137.67 32,141.22 R22.1 | v42.67,137.16 42.93,136.91 42.93,132.08 44.96,130.05 44.96,128.78 45.97,127.76 45.97,127.51 IC6.14
  Bottom 0.508: v42.67,137.16 42.67,138.94 42.42,139.19 42.42,144.53 40.89,146.05 38.61,146.05 36.07,143.51 36.07,142.49 35.31,141.73 33.27,141.73 R22.1
N$46  (via drill 0.61)
  Top 0.508: 25.65,128.27 25.65,131.06 C6.2 | 25.65,128.27 25.65,127.51 R23.1 | v41.91,124.21 41.91,118.36 39.62,116.08 34.54,121.16 32.77,121.16 25.65,128.27
  Bottom 0.508: v41.91,124.21 45.72,124.21 IC6.13
N$47
  Top 0.508: IC6.19 45.97,140.21 45.97,140.46 37.08,149.35 35.56,149.35 35.05,149.86 18.29,149.86 2.54,134.11 2.54,133.1 10.16,125.48 10.16,124.46 7.87,122.17 6.35,123.7 JP10.2
N$48  (via drill 0.61)
  Top 0.508: R14.S 16,127.51 15.75,127.51 14.48,128.78 13.97,128.78 8.64,134.11 8.64,135.13 15.24,141.73 16,140.97 C14.1 16.76,140.46 17.02,140.21 17.02,137.92 20.83,134.11 v20.83,133.6 | v41.15,140.97 42.42,139.7 42.42,139.19 44.96,136.65 44.96,131.32 45.97,130.3 45.97,130.05 IC6.15
  Bottom 0.508: v41.15,140.97 41.4,141.22 41.4,143 40.13,144.27 38.61,144.27 37.08,142.75 37.08,142.24 34.04,139.19 31.75,139.19 29.72,137.16 29.72,136.91 26.42,133.6 v20.83,133.6
N$49
  Top 1.524: IC4.2 63.5,137.92 64.01,137.92 65.02,136.91 65.02,136.14 77.22,123.95 D17.C
  Bottom 1.524: D17.C D21.A 78.49,133.35 82.8,137.67 106.68,137.67 X9.1
N$50  (via drill 0.61)
  Top 1.524: v69.09,141.73 74.42,141.73 82.8,133.35 D22.A D18.C
  Bottom 1.524: v69.09,141.73 55.37,141.73 54.36,140.72 54.36,138.68 55.37,137.67 55.88,137.67 IC4.3 | X9.2 106.68,134.37 98.81,134.37 97.54,135.64 87.12,135.64 84.84,133.35 D22.A
N$51
  Top 1.524: D19.C D23.A
  Bottom 1.524: IC4.13 55.88,123.95 55.37,123.95 54.36,122.94 54.36,118.87 57.91,115.32 59.94,115.32 63.75,111.51 80.01,111.51 89.15,120.65 D19.C | X9.3 106.68,129.79 98.81,129.79 97.54,128.52 93.47,128.52 91.19,130.81 D23.A
N$52  (via drill 0.61)
  Top 1.524: v82.04,110.49 73.66,118.87 68.58,118.87 64.77,122.68 63.5,122.68 IC4.14 | 96.52,126.24 D24.A | D20.C 96.52,126.24 | X9.4 106.68,126.24 96.52,126.24
  Bottom 1.524: v82.04,110.49 89.92,118.36 93.22,118.36 95.5,120.65 D20.C
N$53  (via drill 0.61)
  Top 0.508: v46.23,145.54 43.94,145.54 v41.15,148.34
  Bottom 0.508: v46.23,145.54 46.23,142.75 IC6.20 | v41.15,148.34 35.56,148.34 34.8,147.57 R15.1
N$54
  Top 0.508: R16.1 34.54,122.68 38.1,119.13 IC6.10
N$55  (via drill 0.61)
  Top 0.508: v49.02,147.57 49.53,148.08 54.61,148.08 v54.86,147.83 | v56.64,149.61 56.13,149.61 55.63,150.11 40.39,150.11 v39.88,149.61 | v28.19,145.03 28.19,140.97 22.35,135.13 23.11,134.37 23.11,125.98 v21.59,124.46 | v21.59,117.35 21.59,114.55 v24.13,112.01 | v22.1,100.33 22.1,96.01 12.45,86.36 JP8.5
  Bottom 0.508: v49.02,147.57 49.02,136.14 48.01,135.13 IC6.17 | v56.64,149.61 v54.86,147.83 | v39.88,149.61 32.77,149.61 v28.19,145.03 | v21.59,117.35 v21.59,124.46 | v24.13,112.01 24.13,102.36 v22.1,100.33
N$56  (via drill 0.61)
  Top 0.508: v11.94,116.84 20.57,125.48 20.57,125.73 21.08,126.24 21.08,127.25 19.3,129.03 22.1,131.83 22.1,134.11 18.03,138.18 28.7,148.84 34.8,148.84 35.31,148.34 36.83,148.34 44.96,140.21 44.96,138.94 45.97,137.92 45.97,137.67 IC6.18 | v8.38,107.44 8.38,87.88 9.91,86.36 JP8.6
  Bottom 0.508: v11.94,116.84 11.94,111 v8.38,107.44
N$57  (via drill 0.61)
  Top 0.508: v36.58,58.42 40.64,58.42 v42.42,56.64 | v58.93,56.64 59.69,56.64 v67.06,49.28 | v94.49,49.28 112.78,67.56 112.78,107.44 109.73,110.49 X19.1
  Bottom 0.508: v36.58,58.42 36.58,54.86 32.26,50.55 31.24,50.55 30.23,51.56 29.72,51.56 JP5.3 | v42.42,56.64 v58.93,56.64 | v67.06,49.28 v94.49,49.28
N$58
  Bottom 0.508: JP5.1 26.16,52.58 22.61,52.58 19.81,55.37 12.7,55.37 10.92,53.59 IC7.OUT
N$60
  Top 0.508: X12.2 19.05,65.28 25.65,71.88 24.64,72.9 24.64,79.25 28.45,83.06 28.7,82.8 35.81,82.8 36.58,83.57 36.32,83.82 JP9.4
N$61
  Bottom 0.508: X11.2 30.48,75.95 37.34,75.95 37.59,75.69 38.61,75.69 39.88,76.96 39.88,77.98 34.04,83.82 JP9.5
N$62  (via drill 0.61)
  Top 0.508: v15.49,80.01 15.49,78.23 16.51,77.22 16.51,76.71 X13.2
  Bottom 0.508: v15.49,80.01 18.29,82.8 30.73,82.8 31.75,83.82 JP9.6
N$64  (via drill 0.61)
  Top 0.508: v46.48,32.26 44.96,33.78 44.96,35.56 JP1.1 | v51.82,34.54 51.82,36.32 v50.29,37.85 | v54.86,39.12 54.36,39.12 51.31,42.16 44.96,42.16 JP2.1
  Bottom 0.508: v46.48,32.26 49.53,32.26 v51.82,34.54 | v50.29,37.85 50.8,38.35 51.05,38.35 51.82,39.12 v54.86,39.12
N$65
  Bottom 0.508: JP1.2 JP2.2
N$66
  Bottom 0.508: JP1.3 JP2.3
N$67
  Bottom 0.508: JP1.4 JP2.4
N$68
  Bottom 0.508: JP1.5 JP2.5
N$70
  Bottom 0.508: JP1.6 JP2.6
N$71
  Top 0.508: JP3.1 JP4.1
N$72
  Top 0.508: IC4.15 55.88,121.41 55.88,115.82 54.86,114.81 R13.2
  Bottom 0.508: R23.2 33.27,126.49 37.34,122.43 37.34,118.62 41.91,114.05 54.1,114.05 R13.2
N$73
  Top 0.508: IC4.1 55.88,140.21 55.88,142.49 55.37,143 55.37,145.03 54.86,145.54 R10.2
  Bottom 0.508: R22.2 25.15,142.75 22.1,145.8 22.1,147.32 25.65,150.88 50.04,150.88 54.36,146.56 R10.2
N$74  (via drill 0.61)
  Top 0.508: v61.47,111.25 62.74,109.98 64.26,109.98 65.28,108.97 65.53,108.97 IC3.11
  Bottom 0.508: v61.47,111.25 60.96,111.76 60.96,112.01 59.18,113.79 57.91,113.79 56.39,112.27 42.42,112.27 38.61,116.08 21.59,116.08 19.05,113.54 16,113.54 10.67,108.2 10.67,106.43 7.37,103.12 7.37,96.27 6.35,95.25 JP13.2
N$75  (via drill 0.61)
  Top 1.524: v69.09,22.61 64.52,27.18 63.5,27.18 IC2.2 | D1.C D5.A
  Bottom 1.524: v69.09,22.61 75.44,22.61 76.45,21.59 D1.C | X1.1 106.68,31.75 105.92,31.75 99.57,38.1 84.84,38.1 78.49,31.75 D5.A
N$76  (via drill 0.61)
  Top 0.508: C10.2 20.83,14.22 24.89,14.22 R17.1 | v55.37,2.29 51.82,5.84 51.82,6.86 49.28,9.4 49.28,9.65 IC5.13 | v62.99,45.21 v68.58,39.62 | v46.99,40.13 43.18,40.13 42.42,40.89 v30.48,40.89 | v23.37,33.02 v26.16,33.02
  Bottom 0.508: v55.37,2.29 55.88,2.29 56.64,1.52 96.77,1.52 112.78,17.53 112.78,32.26 105.41,39.62 v68.58,39.62 | v62.99,45.21 59.18,45.21 58.93,45.47 52.32,45.47 v46.99,40.13 | v30.48,40.89 30.48,38.35 28.7,36.58 28.7,35.56 v26.16,33.02 | v23.37,33.02 18.29,27.94 18.29,16.26 20.07,14.48 C10.2
N$77  (via drill 0.61)
  Top 0.508: C13.1 1.78,25.91 1.78,20.32 7.37,14.73 R3.S 7.62,12.45 11.43,8.64 32.26,8.64 35.56,5.33 35.56,3.81 36.83,2.54 42.16,2.54 43.94,4.32 v43.94,11.18
  Bottom 0.508: v43.94,11.18 43.94,11.43 47.24,14.73 IC5.15
N$78
  Top 0.508: IC5.11 47.24,4.57 47.24,4.32 44.45,1.52 32.77,1.52 29.21,5.08 JP14.2
N$79
  Top 0.508: C3.+ C2.2 4.32,43.43 8.38,47.5 | 8.38,47.5 5.59,50.29 IC7.IN | 8.38,47.5 9.14,46.74 18.03,46.74 21.34,50.04 21.34,51.56 20.32,52.58 20.32,52.83 JP7.2
N$80
  Top 0.508: R9.E 13.72,99.31 13.72,106.68 12.95,107.44 R25.1
N$81
  Top 0.508: R24.1 10.67,134.87 11.94,134.87 19.05,127.76 R14.E
N$83  (via drill 0.61)
  Top 0.508: v57.66,61.72 57.66,65.53 IC1.15
  Bottom 0.508: v57.66,61.72 55.88,59.94 55.12,59.94 R8.2 | R20.2 33.53,96.27 37.34,96.27 49.78,83.82 49.78,71.63 55.88,65.53 IC1.15
N$84  (via drill 0.61)
  Top 0.508: v8.89,124.97 1.52,132.33 1.52,134.62 17.78,150.88 36.83,150.88 43.43,144.27 47.75,144.27 49.02,143 49.02,136.14 53.34,131.83 53.34,129.54 53.85,129.03 53.85,125.22 48.26,119.63 IC6.11 | v8.89,116.08 7.11,114.3 6.6,114.81 6.35,114.81 JP11.2
  Bottom 0.508: v8.89,116.08 v8.89,124.97
N$85  (via drill 0.61)
  Top 0.508: v3.56,88.39 1.78,86.61 1.78,84.07 3.05,82.8 3.05,77.98 4.06,76.96 4.06,66.8 5.08,65.79 5.08,65.28 X14.2
  Bottom 0.508: v3.56,88.39 25.4,88.39 26.42,87.38 28.19,87.38 29.21,86.36 JP9.7
N$86  (via drill 0.61)
  Top 0.508: v6.1,87.12 5.08,88.14 2.79,85.85 2.79,84.33 4.06,83.06 4.06,78.23 5.08,77.22 5.08,76.71 X15.2
  Bottom 0.508: v6.1,87.12 6.6,87.12 6.86,87.38 25.15,87.38 26.16,86.36 JP9.8
N$87  (via drill 0.61)
  Top 0.508: v29.97,69.09 30.23,69.09 32.26,67.06 30.48,65.28 X10.2 | v41.91,72.9 41.91,76.45 40.89,77.47 40.89,82.3 39.37,83.82 JP9.3
  Bottom 0.508: v29.97,69.09 31.24,70.36 39.37,70.36 v41.91,72.9
N$88  (via drill 0.61)
  Top 0.508: JP3.4 JP4.4 | v29.97,45.21 31.24,46.48 31.24,51.56 JP5.5
  Bottom 0.508: v29.97,45.21 27.43,45.21 27.18,45.47 20.07,45.47 19.05,44.45 JP4.4
N$89
  Top 0.508: JP3.5 JP4.5
N$97  (via drill 0.61)
  Top 0.508: v39.88,103.63 33.27,110.24 33.27,112.52 R19.2 | IC1.1 55.88,84.33 55.88,87.12 55.63,87.38 55.63,88.9 54.86,89.66 R7.2
  Bottom 0.508: v39.88,103.63 39.88,100.84 50.29,90.42 54.1,90.42 R7.2
N$98
  Top 0.508: JP3.6 JP4.6
VCC  (via drill 0.61)
  Top 0.508: 80.01,93.47 85.34,93.47 88.14,96.27 87.63,96.77 87.63,114.3 81.28,120.65 81.28,123.19 55.37,149.1 48.51,149.1 46.48,147.07 50.04,143.51 50.04,136.4 56.39,130.05 IC4.9 | 80.01,93.47 76.71,93.47 71.12,99.06 71.12,99.57 64.01,106.68 64.01,106.93 IC3.12 | JP13.3 6.35,98.3 6.35,99.31 7.37,100.33 7.37,105.66 6.35,106.68 JP12.3 | 17.78,108.46 15.49,108.46 12.95,111 6.6,111 6.35,111.25 JP11.3 3.81,111.76 1.52,114.05 1.52,117.09 3.81,119.38 3.81,120.14 JP10.3 | 17.78,108.46 18.29,108.46 19.05,107.7 19.81,107.7 R25.2 20.07,107.44 34.04,93.47 34.04,91.95 R12.2 | 17.78,108.46 17.78,112.78 16,114.55 20.07,118.62 22.1,118.62 22.86,117.86 23.62,117.86 R11.2 | R26.2 11.68,20.83 11.68,25.65 R6.2 | v53.59,19.05 55.37,17.27 55.88,17.27 IC2.9 | JP5.2 27.69,55.63 28.7,54.61 JP5.4 29.72,54.61 30.23,54.1 31.24,54.1 JP5.6 | C4.2 42.67,51.05 39.62,54.1 39.12,54.1 30.48,62.74 X10.1 | 15.49,73.66 X15.1 | 15.49,73.66 X13.1 | 15.49,73.66 15.49,64.26 16.51,63.25 16.51,62.74 X12.1 | v2.79,56.39 2.79,58.67 5.59,61.47 5.33,61.72 X14.1 | v42.16,89.66 42.67,89.66 46.48,85.85 46.48,80.77 C5.+ 43.94,76.96 45.72,75.18 53.09,75.18 55.12,73.15 55.88,73.15 IC1.9 58.42,73.66 59.94,72.14 59.94,65.02 69.09,55.88 74.93,61.72 v74.93,63.25 | v80.01,89.41 80.01,93.47
  Bottom 0.508: IC6.12 48.26,122.17 48.51,122.17 55.88,129.54 IC4.9 | R11.2 R16.2 23.88,123.7 23.88,124.46 18.03,130.3 18.03,134.11 R24.2 18.29,134.87 26.42,134.87 28.7,137.16 28.7,142.49 24.38,146.81 R15.2 | JP11.3 JP12.3 | R5.2 R6.2 12.95,26.16 17.27,21.84 17.27,14.99 20.32,11.94 30.99,11.94 | 30.99,11.94 30.99,8.38 31.75,7.62 JP14.3 | 30.99,11.94 30.99,19.05 32.77,20.83 32.77,23.62 R4.2 | JP14.3 32.26,5.08 34.8,2.54 42.16,2.54 43.69,4.06 43.69,4.32 46.74,7.37 46.99,7.37 IC5.12 49.53,7.62 50.29,8.38 50.29,10.67 53.59,13.97 v53.59,19.05 | JP15.3 20.83,5.08 25.15,5.08 26.16,4.06 30.73,4.06 31.75,5.08 JP14.3 | X14.1 X12.1 X10.1 JP5.4 | X13.1 X11.1 30.48,74.17 38.35,74.17 41.15,76.96 42.42,76.96 C5.+ | v2.79,56.39 2.79,51.05 6.1,47.75 6.1,27.94 11.18,22.86 11.18,20.83 R26.2 | v42.16,89.66 40.64,91.19 34.8,91.19 R12.2 | v80.01,89.41 80.01,77.47 74.93,72.39 v74.93,63.25
VSS  (via drill 0.61)
  Top 1.524: D7.C 89.15,46.99 84.84,46.99 D6.C 82.8,44.45 78.49,44.45 D5.C | D24.C 95.5,146.05 91.19,146.05 D23.C 89.15,148.59 84.84,148.59 D22.C 82.8,146.05 78.49,146.05 D21.C | D13.C 91.19,97.79 95.5,97.79 D16.C 97.54,97.79 97.79,97.79 98.55,97.03 105.41,97.03 X19.4 | D14.C 82.8,95.25 78.49,95.25 D15.C 77.22,98.55 68.58,107.19 68.58,108.97 64.77,112.78 v64.77,113.54
  Bottom 1.524: D7.C D8.C | 64.77,46.99 76.45,46.99 D5.C | 60.71,46.99 64.77,46.99 | 60.71,46.99 26.42,46.99 23.11,50.29 20.32,50.29 JP7.1 | IC2.4 63.5,24.64 64.01,24.64 65.02,25.65 65.02,33.53 64.77,33.78 64.77,46.99 | 65.53,136.4 66.8,136.4 76.45,146.05 D21.C | 65.53,136.4 63.5,136.4 IC4.4 | 64.52,81.03 77.22,93.73 77.22,94.49 D15.C | 64.52,81.03 64.01,80.52 63.5,80.52 IC1.4 | D14.C D13.C | v64.77,113.54 64.77,114.55 65.53,115.32 65.53,136.4 | 60.71,46.99 60.71,61.98 65.02,66.29 65.02,80.52 64.52,81.03